# Altium PCB 7797-20-0224.PcbDoc (part 1 of 2)
Units mil, origin at the board's own origin, x right, y up, seen from the top; angles counter-clockwise.
Board outline 1680 x 2800 mil, 2 copper layers (Top Layer, Bottom Layer), stack 12.8 mil thick; 114 components, 80 nets, 405 pads, 230 vias.
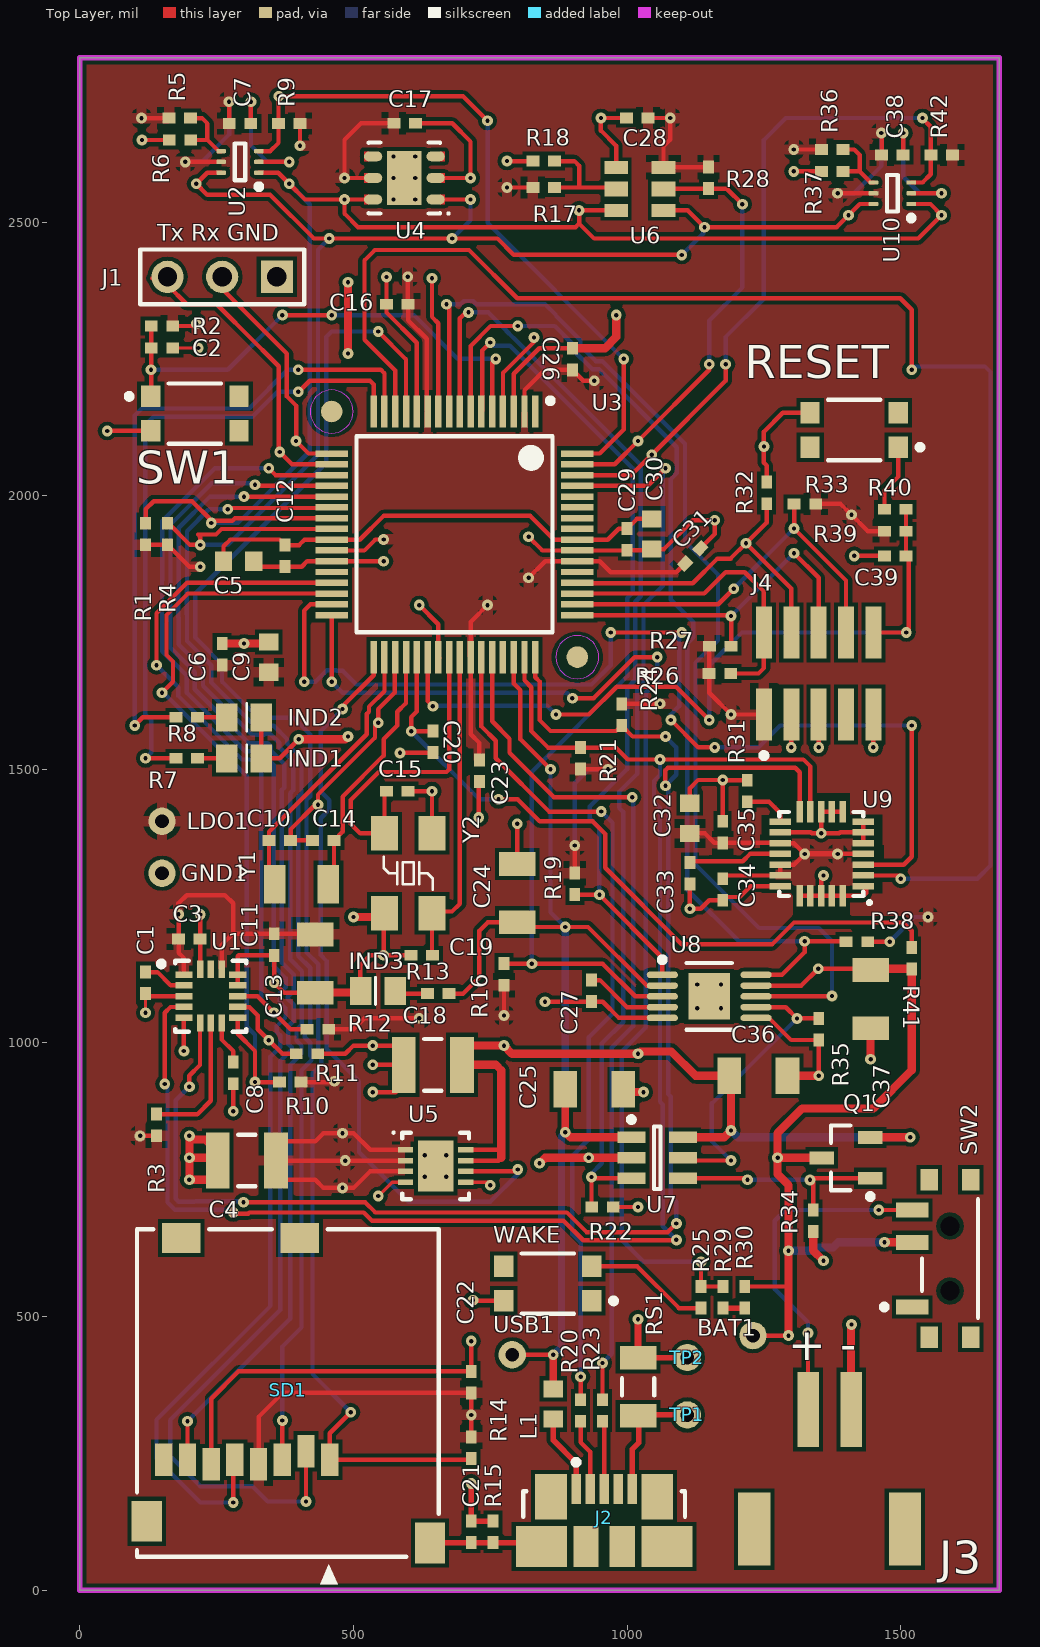
[diagram p0: Top Layer view]
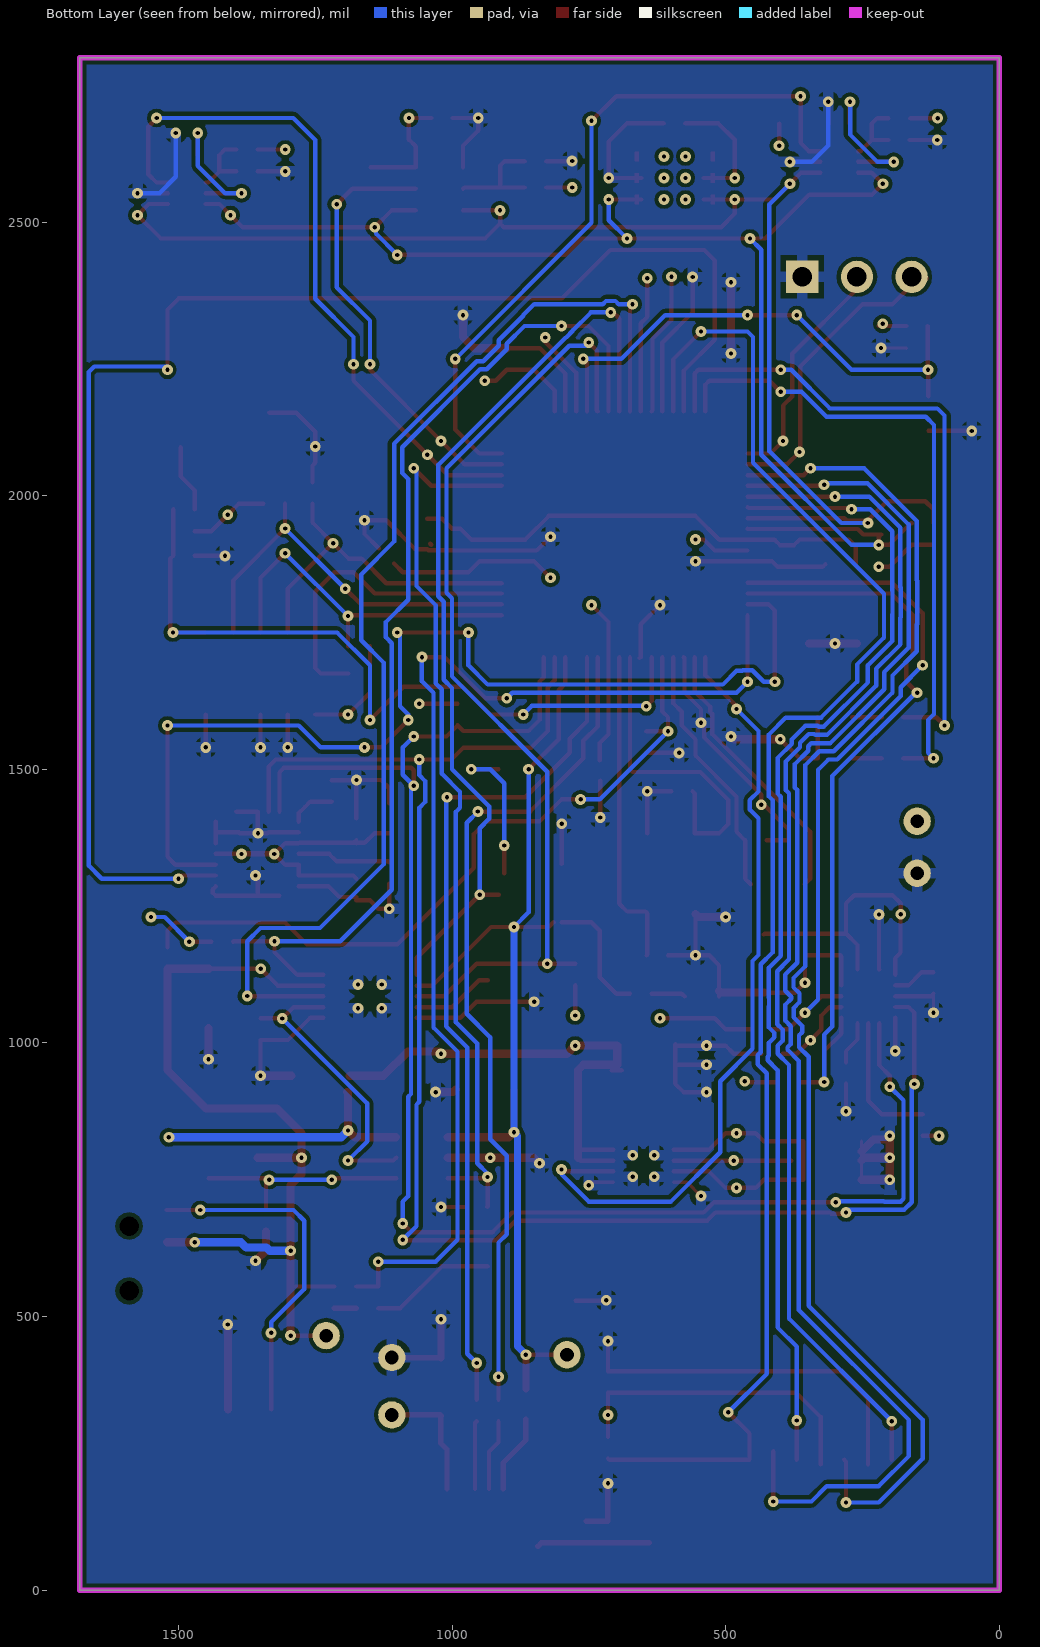
[diagram p1: Bottom Layer view, seen from below]

## Layer stack, top to bottom
Top Solder: solder mask 0.4, Solder Resist, Dk 3.5
Top Layer: signal copper 1.4
Dielectric 2: core 10, Dk 4.2
Bottom Layer: signal copper 1.4
Bottom Solder: solder mask 0.4, Solder Resist, Dk 3.5

## Board outline
20,0 1680,0 1680,2800 0,2800 0,0

## Design rules (kind name [scope] priority, off if disabled: settings)
AcuteAngle [All] p1: minimum=6.00000000000000E+0001 checktracksonly=FALSE
Clearance Clearance-uC [InComponent('U6')] p1: gap=6 ignorepadtopadclearanceinfootprint=FALSE except(0: Arc-Hole Track-Hole SMDPad-Hole THPad-Hole Via-Hole Fill-Hole Poly-Hole Region-Hole Text-Hole)
Clearance [All] p2: gap=7 ignorepadtopadclearanceinfootprint=FALSE except(0: Arc-Hole Track-Hole SMDPad-Hole THPad-Hole Via-Hole Fill-Hole Poly-Hole Region-Hole Text-Hole)
MinimumAnnularRing [All] p1: minimumring=5
PolygonConnect PolygonConnect_2 [All vs IsNamedPolygon('Bottom layer_full')] p1: connectstyle=Relief reliefconductorwidth=20 reliefentries=4 polygonreliefangle="90 Angle" airgapwidth=10
PolygonConnect PolygonConnect_1 [All vs IsNamedPolygon('Top layer_full')] p2: connectstyle=Relief reliefconductorwidth=20 reliefentries=4 polygonreliefangle="90 Angle" airgapwidth=10
PolygonConnect [All] p3: connectstyle=Relief reliefconductorwidth=10 reliefentries=4 polygonreliefangle="90 Angle" airgapwidth=10
RoutingVias [All] p1: holewidth=28 width=50 viastyle="Through Hole" minholewidth=28 minwidth=50 maxholewidth=28 maxwidth=50 useviatemplates=TRUE viatemplateguid#1={3E3A0D4B-A0A5-4DA1-8870-E81B4EFEB651} viatemplatename#1=v50h20
SolderMaskExpansion [All] p1: expansion=4
Width "Width Power" [(InNet('sGND') OR InNet('sPWR_3V7') OR InNet('sPWR_5V0') OR InNet('sUNREG') OR InNet('NetJ203_1') OR InNet('NetJ200_1') OR InNet('NetJ200_5'))] p1: maxlimit=15 minlimit=6 preferedwidth=15
Width [All] p2: maxlimit=10 minlimit=8 preferedwidth=8
30 further rules are at their usual default settings.

## Classes and differential pairs
channel class _temperature: "Temperature Left" "Temperature Right"
component class "Temperature Right": C38 R36 R37 R42 U10
component class "Temperature Left": C7 R5 R6 R9 U2
component class "Light And Humidity": C17 C28 R17 R18 R28 U4 U6
component class I/O: C2 IND1 IND2 IND3 J1 R2 R7 R8 R13 SW1
component class "I2C 0": R21 R24
component class "Accelerometer and Mangnetometer": C1 C3 C8 C11 C13 R3 R10 R11 R12 U1
component class Microcontroller: 90 C5 C6 C9 C10 C12 C14 C15 C16 C19 C20 C23 C26 C29 C30 C31 C39 J4 R25 R26 R27 R29 R30 R32 R33 R39 R40 R41 RESET U3 WAKE Y1 Y2
component class Power: BAT1 C4 C18 C21 C24 C25 C27 C36 C37 GND1 J2 J3 L1 LDO1 Q1 R15 R16 R19 R20 R22 R23 R34 R35 R38 RS1 SW2 TP1 TP2 U5 U7 U8 USB1
component class Gyroscope: C32 C33 C34 C35 R31 U9
component class "I2C 1": R1 R4
component class "Micro SD": C22 R14 SD1

## Components (designator, comment, footprint, x,y, rotation, side; value= is the part's Value field where it differs from the comment)
BAT1 "TP" TP_TH 1230,465 r90 top
C1 "GRM155R71A104KA01D" 0402 120,1109.69 r270 top value=0.1u
C2 "GRM155R71H102KA01J" 0402 150,2270 r180 top value=1000p
C3 "GRM155R71A104KA01D" 0402 200,1190 r180 top value=0.1u
C4 "GRM32ER71H106KA12L" 1210 305,785 r0 top value=10u
C5 "GRM188R71A225KE15D" 0603 290,1880 r0 top value=2.2u
C6 "GRM155R71C103KA01D" 0402 260,1710 r90 top value="0.01 µF"
C7 "GRM155R71C103KA01D" 0402 292.56,2680 r180 top value="0.01 µF" (schematic designator C9)
C8 "GRM155R71A104KA01D" 0402 280,945 r270 top value=0.1u (schematic designator C7)
C9 "GRM188R71A105KA61J" 0603 345,1705 r90 top value=1u (schematic designator C8)
C10 "GRM1555C1H240GA01D" 0402 365.32,1370 r180 top value=24p
C11 "GRM155R71A104KA01D" 0402 355,1179.68 r90 top value=0.1u
C12 "GRM155R71A104KA01D" 0402 375,1890 r270 top value=0.1u
C13 "GRM31CR71H475KA12L" 1206 430,1145 r90 top value=4.7u
C14 "GRM1555C1H240GA01D" 0402 444.69,1370 r0 top value=24p
C15 "GRM1555C1H330FA01D" 0402 580,1460 r180 top value=33p
C16 "GRM155R71A104KA01D" 0402 580,2350 r180 top value=0.1u
C17 "GRM155R71A104KA01D" 0402 593.43,2680.63 r180 top value=0.1u (schematic designator C36)
C18 "GRM32ER71H106KA12L" 1210 645,960 r0 top value=10u
C19 "GRM1555C1H330FA01D" 0402 625,1160 r0 top value=33p
C20 "GRM155R71A104KA01D" 0402 645,1550 r270 top value=0.1u
C21 "GRM155R71A104KA01D" 0402 715,106.38 r270 top value=0.1u
C22 "GRM155R71C103KA01D" 0402 715,380 r270 top value="0.01 µF"
C23 "GRM155R71A104KA01D" 0402 730,1497 r270 top value=0.1u
C24 "GRM31CR71H475KA12L" 1206 799.37,1273.78 r270 top value=4.7u
C25 "GRM31CR71H475KA12L" 1206 940,915 r180 top value=4.7u
C26 "GRM155R71C103KA01D" 0402 900,2249.69 r90 top value="0.01 µF"
C27 "GRM155R71A104KA01D" 0402 935,1095 r90 top value=0.1u
C28 "GRM155R71A104KA01D" 0402 1018.43,2690.12 r0 top value=0.1u (schematic designator C17)
C29 "GRM155R71A104KA01D" 0402 1000,1920 r270 top value=0.1u (schematic designator C28)
C30 "GRM188R71A105KA61J" 0603 1045,1930 r270 top value=1u (schematic designator C29)
C31 "GRM155R71C103KA01D" 0402 1120,1890 r45 top value="0.01 µF" (schematic designator C30)
C32 "GRM188R71A105KA61J" 0603 1114.69,1410.32 r90 top value=1u (schematic designator C31)
C33 "GRM155R71A104KA01D" 0402 1114.69,1310.32 r270 top value=0.1u (schematic designator C32)
C34 "GRM155R71A104KA01D" 0402 1174.69,1280.32 r90 top value=0.1u (schematic designator C33)
C35 "GRM155R71A104KA01D" 0402 1174.69,1385.32 r270 top value=0.1u (schematic designator C34)
C36 "GRM31CR71H475KA12L" 1206 1240,940 r180 top value=4.7u (schematic designator C35)
C37 "GRM31CR71H475KA12L" 1206 1445,1080 r90 top value=4.7u
C38 "GRM155R71C103KA01D" 0402 1484.69,2622.64 r180 top value="0.01 µF" (schematic designator C9)
C39 "GRM155R71A104KA01D" 0402 1490,1890 r180 top value=0.1u (schematic designator C38)
GND1 "TP" TP_TH 150,1310 r90 top
IND1 "LTST-C171GKT" 0805 300,1520 r0 top
IND2 "LTST-C171KSKT" 0805 300,1595 r0 top
IND3 "LTST-C171TBKT" 0805 545,1095 r180 top
J1 "Header 3" HDR1X3 360,2400 r180 top
J2 "47346-0001" MOLX-47346-0001-5_V 957.97,87.87 r0 top locked
J3 "S2B-PH-SM4-TB" S2B-PH-SM4-TB 1370,330 r0 top locked
J4 "M50-3600542" M50-3600542 1350,1675 r0 top
L1 "MPZ1608S331A" 1608[0603] 865,340 r90 top value="330 ohms"
LDO1 "TP" TP_TH 150,1405 r90 top
Q1 "IRLML6401" Micro3_N 1400,790 r180 top
R1 "CRCW04025K60FKEDHP" 0402 120,1930 r270 top value=5.6k (schematic designator R4)
R2 "CRCW040210K0FKEDHP" 0402 150,2310 r0 top value=10k (schematic designator R5)
R3 "CRCW040210K0FKED" 0402 140,850 r270 top value=10k (schematic designator R6)
R4 "CRCW04025K60FKEDHP" 0402 160,1930 r270 top value=5.6k (schematic designator R7)
R5 "DNP" 0402 182.56,2690 r180 top value=10k (schematic designator R10)
R6 "DNP" 0402 182.87,2650 r180 top value=10k (schematic designator R3)
R7 "CRCW0402560RFKEDHP" 0402 195,1520 r180 top value=560 (schematic designator R8)
R8 "CRCW0402560RFKEDHP" 0402 195,1595 r180 top value=560 (schematic designator R9)
R9 "CRCW040210K0FKED" 0402 382.56,2680 r180 top value=10k (schematic designator R22)
R10 "CRCW040210K0FKED" 0402 384.69,928.33 r180 top value=10k (schematic designator R12)
R11 "CRCW040210K0FKED" 0402 415,980 r0 top value=10k (schematic designator R13)
R12 "CRCW040210K0FKED" 0402 435,1025 r180 top value=10k (schematic designator R14)
R13 "CRCW0402560RFKEDHP" 0402 655,1090 r0 top value=560 (schematic designator R15)
R14 "CRCW040210K0FKEDHP" 0402 715,260 r90 top value=10k (schematic designator R16)
R15 "CRCW04021M00FKEDHP" 0402 755,106.38 r270 top value=1M (schematic designator R17)
R16 "CRCW040210K0FKED" 0402 775,1125 r90 top value=10k (schematic designator R18)
R17 "DNP" 0402 847.48,2563.27 r180 top value=10k (schematic designator R1)
R18 "DNP" 0402 847.48,2611.5 r180 top value=10k (schematic designator R11)
R19 "CRCW040210K0FKED" 0402 904.37,1290.63 r270 top value=10k
R20 "CRCW040233R0FKED" 0402 915,328.19 r90 top value=33
R21 "CRCW04025K60FKEDHP" 0402 915,1520 r270 top value=5.6k
R22 "CRCW040210K0FKED" 0402 955,700 r180 top value=10k (schematic designator R23)
R23 "CRCW040233R0FKED" 0402 955,328.19 r90 top value=33 (schematic designator R24)
R24 "CRCW04025K60FKEDHP" 0402 990,1600 r90 top value=5.6k (schematic designator R25)
R25 "CRCW0402560RFKEDHP" 0402 1135,535 r90 top value=560 (schematic designator R27)
R26 "CRCW040210K0FKED" 0402 1169.69,1675 r0 top value=10k (schematic designator R28)
R27 "CRCW040210K0FKED" 0402 1170,1725 r0 top value=10k (schematic designator R29)
R28 "CRCW040210K0FKED" 0402 1148.74,2580.75 r270 top value=10k (schematic designator R26)
R29 "CRCW0402100KFKED" 0402 1175,535 r90 top value=100k (schematic designator R31)
R30 "CRCW0402100KFKED" 0402 1215,535 r270 top value=100k (schematic designator R32)
R31 "CRCW040210K0FKED" 0402 1219.69,1460.32 r90 top value=10k (schematic designator R33)
R32 "CRCW040210K0FKED" 0402 1255,2005 r270 top value=10k (schematic designator R34)
R33 "CRCW040210K0FKED" 0402 1325,1985 r180 top value=10k (schematic designator R35)
R34 "CRCW04021M00FKEDHP" 0402 1340,675 r90 top value=1M (schematic designator R36)
R35 "CRCW04023K40FKED" 0402 1350,1025 r90 top value=3.4k (schematic designator R37)
R36 "DNP" 0402 1374.69,2632.64 r180 top value=10k (schematic designator R10)
R37 "DNP" 0402 1375,2592.64 r180 top value=10k (schematic designator R3)
R38 "CRCW040210K0FKED" 0402 1420,1185 r180 top value=10k
R39 "CRCW040210K0FKED" 0402 1490,1935 r180 top value=10k
R40 "CRCW0402560RFKEDHP" 0402 1490,1975 r0 top value=560
R41 "CRCW040256R0FKED" 0402 1520,1155 r270 top value=56
R42 "CRCW040210K0FKED" 0402 1574.69,2622.64 r180 top value=10k (schematic designator R22)
RESET "KMR231GLFS" KMR231GLFS 1415,2120 r180 top
RS1 "WSL1206R1000FEA" C1206 1020,371.5 r270 top value=0.1
SD1 "2908-05WB-MG" 3M-2908-05WB-MG_V 380,360 r180 top locked
SW1 "KMR231GLFS" KMR231GLFS 210,2150 r0 top
SW2 "PCM12SMTR" CKCP-PCM12SMTR_V 1590,605.95 r90 top
TP1 "TP" TP_TH 1110,320 r90 top
TP2 "TP" TP_TH 1110,425 r90 top
U1 "FXOS8700CQR1" FREE-QFN-16-3000X3000DE_V 239.21,1085.32 r0 top
U2 "TMP102AIDRLT" DRL0006A_L 292.56,2610 r180 top (schematic designator U4)
U3 "TM4C123GH6PM" QFP50P1200X1200X160-64N 684.53,1929.41 r270 top (schematic designator U2)
U4 "SI7006-A20-IM1" SLAB-DFN-6-1500X2400TP_V 592.91,2580.63 r180 top (schematic designator U9)
U5 "LT1965EDD-3.3#TRPBF" LT-DD-8_V 650,775 r0 top (schematic designator U3)
U6 "APDS-9303" APDS-9303 1023.19,2560.75 r180 top (schematic designator U5)
U7 "LTC4410ES6#PBF" LT-S6-6-TSOT-23_N 1055,790 r0 top (schematic designator U6)
U8 "LTC4053EMSE-4.2#PBF" LT-MSE-10-EDP-2060x1830TP_N 1150,1085 r0 top (schematic designator U7)
U9 "FXAS21002C" "SMD QFN 24_4X4MM 7/5" 1354.69,1345.32 r180 top (schematic designator U8)
U10 "TMP102AIDRLT" DRL0006A_L 1484.69,2552.64 r180 top (schematic designator U4)
USB1 "TP" TP_TH 790,430 r90 top
WAKE "KMR231GLFS" KMR231GLFS 855,560 r180 top
Y1 "CC7V-T1A-32.768kHz-12.5pF-20PPM-TC-QC" CC7V-T1A 405,1290 r0 top
Y2 "ECS-160-20-30B-DU" ECX-53B 600,1310 r90 top

## Footprints (in the part's own frame and the unit in brackets; to place one, negate y for a bottom-side part, rotate by r counter-clockwise, add the part's x,y. Pads: shape width x height; smd on the part's side, far side on the other; paste and mask are expansions set on the pad)
3M-2908-05WB-MG_V [mm] "Connector, MicroSD, 8 Position, Body 15.2x14mm, Pitch 1.1mm"
  rect 0.8x1.5 smd: 1(-1.94,3.1) 2(-0.84,2.7) 3(0.26,3.1) 4(1.36,3.3) 5(2.46,3.1) 6(3.56,3.3) 7(4.66,3.1) 8(5.76,3.1)
  rect 1.4x1.9 smd: 9(6.55,5.95) 12(-6.6,6.95)
  rect 1.8x1.4 smd: 10(4.95,-7.2) 11(-0.55,-7.2)
  silkscreen extent -7,-7.6 7,8.87, body extent -7,-7.6 7,7.6, height 1.85
0402 [mm] "Chip Capacitor, Body 1.0x0.5mm, IPC High Density"
  rect 0.6x0.5 smd: 1(-0.5,0) 2(0.5,0)
  body extent -0.55,-0.3 0.55,0.3, height 1.3
0603 [mm] "Chip Capacitor, Body 1.6x0.8mm, IPC High Density"
  rect 0.8x0.9 smd: 1(-0.7,0) 2(0.7,0)
  body extent -0.87,-0.48 0.87,0.48, height 1.3
0805 [mm]
  rect 1x1.3 smd: 1(-0.8,0) 2(0.8,0)
  silkscreen extent 0.13,-0.63 0.13,0.64, body extent -1.07,-0.64 1.07,0.76, height 0.7
1206 [mm] "Chip Capacitor, Body 3.2x1.6mm, IPC High Density"
  rect 1.1x1.7 smd: 1(-1.35,0) 2(1.35,0)
  body extent -1.7,-0.9 1.7,0.9, height 1.3
1210 [mm] "Chip Capacitor, Body 3.2x2.5mm, IPC High Density"
  rect 1.1x2.6 smd: 1(-1.35,0) 2(1.35,0)
  silkscreen extent -0.4,-1.2 0.4,1.2, body extent -1.7,-1.35 1.7,1.35, height 1.3
1608[0603] [mm] "Chip Capacitor, Body 1.6x0.8mm, IPC High Density"
  rect 0.8x0.9 smd: 1(-0.7,0) 2(0.7,0)
  body extent -0.87,-0.48 0.87,0.48, height 1.3
APDS-9303 [mm]
  rect 1.1x0.6 smd: 1(-1.1,-1) 2(1.1,-1) 4(1.1,1) 5(-1.1,1)
  rect 1.1x0.7 smd: 3(1.1,0) 6(-1.1,0)
  body extent -1.3,-1.1 1.3,1.1, height 0.55
C1206 [mm] "Chip Capacitor, Body 3.2x1.6mm, IPC High Density"
  rect 1.1x1.7 smd: 1(-1.35,0) 2(1.35,0)
  silkscreen extent -0.4,-0.75 0.4,0.75, body extent -1.7,-0.9 1.7,0.9, height 1.3
CC7V-T1A [mm]
  rect 1x1.8 smd: 1(-1.25,0) 2(1.25,0)
  body extent -1.65,-0.76 1.65,0.76, height 0.9
CKCP-PCM12SMTR_V [mm] "SMD, 3-Leads, Body 6.7x2.6mm"
  rect 0.7x1.5 smd: 1(-2.25,1.75) 2(0.75,1.75) 3(2.25,1.75)
  round 0.6 hole 0.9 unplated: MH1(-1.5,0) MH2(1.5,0)
  rect 1x0.8 smd: MP1(-3.65,0.965) MP2(3.65,0.965) MP3(-3.65,-0.965) MP4(3.65,-0.965)
  silkscreen extent -2.75,-1.3 2.75,3.17, body extent -3.68,-2.34 3.67,2.23, height 1.4
DRL0006A_L [mm] "SOT23, 6-Leads, Body 1.7x1.3mm, Pitch 0.5mm, IPC High Density"
  rrect50% 0.45x0.2 smd: 1(-0.875,0.5) 2(-0.875,0) 3(-0.875,-0.5) 4(0.875,-0.5) 5(0.875,0) 6(0.875,0.5)
  silkscreen extent -1,-0.85 0.25,1.27, body extent -0.65,-0.85 0.65,0.85, height 0.6
ECX-53B [mm]
  rect 1.6x1.25 smd: 1(-1.85,-1.1) 2(1.85,-1.1) 3(1.85,1.1) 4(-1.85,1.1)
  silkscreen extent -0.76,-1.14 0.76,1.14, body extent -2.54,-1.65 2.54,1.65, height 0.85
FREE-QFN-16-3000X3000DE_V [mm] "QFN, 16-Leads, Body 3.00x3.00mm, Pitch 0.50mm"
  rect 0.8x0.3 smd: 1(-1.25,1) 2(-1.25,0.5) 3(-1.25,0) 4(-1.25,-0.5) 5(-1.25,-1) 9(1.25,-1) 10(1.25,-0.5) 11(1.25,0) 12(1.25,0.5) 13(1.25,1)
  rect 0.3x0.8 smd: 6(-0.5,-1.25) 7(0,-1.25) 8(0.5,-1.25) 14(0.5,1.25) 15(0,1.25) 16(-0.5,1.25)
  silkscreen extent -2.42,-1.65 1.65,1.65, body extent -1.5,-1.5 1.5,1.5, height 1.25
HDR1X3 [mm] "Connector; Header; 3 Position"
  rect 1.5x1.5 hole 0.9: 1(0,0)
  round 1.5 hole 0.9: 2(2.54,0) 3(5.08,0)
  silkscreen extent -1.27,-1.27 6.35,1.27
KMR231GLFS [mm] "SMD, 4-Leads, Body 4.6x2.8mm"
  rect 0.9x1 smd: 1(-2.05,0.8) 2(2.05,0.8) 3(-2.05,-0.8) 4(2.05,-0.8)
  silkscreen extent -3.17,-1.4 1.21,1.4, body extent -2.3,-1.4 2.3,1.4, height 1.92
LT-DD-8_V [mm] "SON, 8-Leads, Body 3x3mm, Pitch 0.5mm, Thermal Pad 1.65x2.38 mm, IPC Low Density"
  rect 0.7x0.25 smd mask+0.102: 1(-1.4,0.75) 2(-1.4,0.25) 3(-1.4,-0.25) 4(-1.4,-0.75) 5(1.4,-0.75) 6(1.4,-0.25) 7(1.4,0.25) 8(1.4,0.75)
  rect 1.65x2.38 smd mask+0.102: 9(0,0)
  silkscreen extent -2,-1.55 1.55,1.6, body extent -1.5,-1.5 1.5,1.5, height 0.8
LT-MSE-10-EDP-2060x1830TP_N [mm] "SOP, 10-Leads, Body 3.1x3.1mm, Pitch 0.5mm, Thermal Pad 2.17x1.94mm, IPC Medium Density"
  oval 1.45x0.3 smd: 1(-2.175,1) 2(-2.175,0.5) 3(-2.175,0) 4(-2.175,-0.5) 5(-2.175,-1) 6(2.175,-1) 7(2.175,-0.5) 8(2.175,0) 9(2.175,0.5) 10(2.175,1)
  rect 1.94x2.17 smd: 11(0,0)
  silkscreen extent -2.3,-1.55 1.05,1.82, body extent -1.55,-1.55 1.55,1.55, height 1.1
LT-S6-6-TSOT-23_N [mm] "SOT23, 6-Leads, Body 2.9x1.75mm, Pitch 0.95mm, IPC Medium Density"
  rect 1.3x0.55 smd: 1(-1.2,0.95) 2(-1.2,0) 3(-1.2,-0.95) 4(1.2,-0.95) 5(1.2,0) 6(1.2,0.95)
  silkscreen extent -1.32,-1.45 0.15,1.9, body extent -0.87,-1.45 0.87,1.45, height 1
M50-3600542 [mm] "Header, 0.05\", 2x10, SMT"
  rect 0.74x2.4 smd: 1(-2.54,-1.905) 2(-2.54,1.905) 3(-1.27,-1.905) 4(-1.27,1.905) 5(0,-1.905) 6(0,1.905) 7(1.27,-1.905) 8(1.27,1.905) 9(2.54,-1.905) 10(2.54,1.905)
  silkscreen extent -2.67,-3.94 -2.41,-3.68, body extent -3.18,-2.62 3.17,2.88, height 4.7
Micro3_N [mm] "SOT23, 3-Leads, Body 2.9x1.3mm, Pitch 0.95mm, Lead Span 2.3mm, IPC Medium Density"
  rect 1.15x0.6 smd: 1(-1.125,0.95) 2(-1.125,-0.95) 3(1.125,0)
  silkscreen extent -1.25,-1.5 0.7,1.92, body extent -0.7,-1.5 0.7,1.5, height 1.12
MOLX-47346-0001-5_V [mm] "SMD, 5-Leads, Body 7.5x5mm, Pitch 0.65mm"
  rect 0.45x1.38 smd: 1(-1.3,2.46) 2(-0.65,2.46) 3(0,2.46) 4(0.65,2.46) 5(1.3,2.46)
  rect 1.475x2.1 smd: 6(-2.462,2.1) 7(2.462,2.1)
  rect 2.375x1.9 smd: 8(-2.913,-0.2) 11(2.913,-0.2)
  rect 1.175x1.9 smd: 9(-0.837,-0.2) 10(0.837,-0.2)
  silkscreen extent -3.75,1.16 3.75,3.82, body extent -3.99,-2.78 3.99,2.65, height 2.69
QFP50P1200X1200X160-64N [mm]
  rect 1.5x0.3 smd: 1(-5.7,3.75) 2(-5.7,3.25) 3(-5.7,2.75) 4(-5.7,2.25) 5(-5.7,1.75) 6(-5.7,1.25) 7(-5.7,0.75) 8(-5.7,0.25) 9(-5.7,-0.25) 10(-5.7,-0.75) 11(-5.7,-1.25) 12(-5.7,-1.75) 13(-5.7,-2.25) 14(-5.7,-2.75) 15(-5.7,-3.25) 16(-5.7,-3.75) 33(5.7,-3.75) 34(5.7,-3.25) 35(5.7,-2.75) 36(5.7,-2.25) 37(5.7,-1.75) 38(5.7,-1.25) 39(5.7,-0.75) 40(5.7,-0.25) 41(5.7,0.25) 42(5.7,0.75) 43(5.7,1.25) 44(5.7,1.75) 45(5.7,2.25) 46(5.7,2.75) 47(5.7,3.25) 48(5.7,3.75)
  rect 0.3x1.5 smd: 17(-3.75,-5.7) 18(-3.25,-5.7) 19(-2.75,-5.7) 20(-2.25,-5.7) 21(-1.75,-5.7) 22(-1.25,-5.7) 23(-0.75,-5.7) 24(-0.25,-5.7) 25(0.25,-5.7) 26(0.75,-5.7) 27(1.25,-5.7) 28(1.75,-5.7) 29(2.25,-5.7) 30(2.75,-5.7) 31(3.25,-5.7) 32(3.75,-5.7) 49(3.75,5.7) 50(3.25,5.7) 51(2.75,5.7) 52(2.25,5.7) 53(1.75,5.7) 54(1.25,5.7) 55(0.75,5.7) 56(0.25,5.7) 57(-0.25,5.7) 58(-0.75,5.7) 59(-1.25,5.7) 60(-1.75,5.7) 61(-2.25,5.7) 62(-2.75,5.7) 63(-3.25,5.7) 64(-3.75,5.7)
  round 1 smd mask+0.5: 65(-5.7,-5.7) 66(5.7,5.7)
  Top Layer keep-out region: -4.7,-5.7 -4.776,-5.317 -4.993,-4.993 -5.317,-4.776 -5.7,-4.7 -5.7,-4.7 -6.083,-4.776 -6.407,-4.993 -6.624,-5.317 -6.7,-5.7 -6.7,-5.7 -6.624,-6.083 -6.407,-6.407 -6.083,-6.624 -5.7,-6.7 -5.7,-6.7 -5.317,-6.624 -4.993,-6.407 -4.776,-6.083 -4.7,-5.7
  Top Layer keep-out region: 6.7,5.7 6.624,6.083 6.407,6.407 6.083,6.624 5.7,6.7 5.7,6.7 5.317,6.624 4.993,6.407 4.776,6.083 4.7,5.7 4.7,5.7 4.776,5.317 4.993,4.993 5.317,4.776 5.7,4.7 5.7,4.7 6.083,4.776 6.407,4.993 6.624,5.317 6.7,5.7
  silkscreen extent -6.32,-4.55 4.55,4.58, body extent -6.07,-6.07 6.07,6.07, height 1.62
S2B-PH-SM4-TB [mm] "2 pin JST connector"
  rect 1.5x3.4 smd: 0(-3.5,-5.55) 0(3.5,-5.55)
  rect 1x3.5 smd: 1(1,0) 2(-1,0)
  body extent -3.96,-7.22 3.94,1.38, height 5.6
SLAB-DFN-6-1500X2400TP_V [mm] "SON, 6-Leads, Body 3x3mm, Pitch 1mm, Thermal Pad 1.6x2.5mm"
  oval 0.85x0.45 smd mask+0.152: 1(-1.45,1) 2(-1.45,0) 3(-1.45,-1) 4(1.45,-1) 5(1.45,0) 6(1.45,1)
  rect 1.6x2.5 smd mask+0.152: 7(0,0)
  Top Layer region: 1.65,0.775 1.875,0.775 1.875,1.225 1.65,1.225
  Top Layer region: -1.875,-1.225 -1.65,-1.225 -1.65,-0.775 -1.875,-0.775
  Top Layer region: -1.875,-0.225 -1.65,-0.225 -1.65,0.225 -1.875,0.225
  Top Layer region: -1.875,0.775 -1.65,0.775 -1.65,1.225 -1.875,1.225
  Top Layer region: 1.65,-0.225 1.875,-0.225 1.875,0.225 1.65,0.225
  Top Layer region: 1.65,-1.225 1.875,-1.225 1.875,-0.775 1.65,-0.775
  silkscreen extent -2.1,-1.65 1.65,1.7, body extent -1.5,-1.5 1.5,1.5, height 0.8
"SMD QFN 24_4X4MM 7/5" [mm]
  rect 1x0.3 smd: 1(-1.95,1.5) 2(-1.95,1) 3(-1.95,0.5) 4(-1.95,0) 5(-1.95,-0.5) 6(-1.95,-1) 7(-1.95,-1.5) 13(1.9,-1.5) 14(1.9,-1) 15(1.9,-0.5) 16(1.9,0) 17(1.9,0.5) 18(1.9,1) 19(1.9,1.5)
  rect 0.3x1 smd: 8(-1,-1.95) 9(-0.5,-1.95) 10(0,-1.95) 11(0.5,-1.95) 12(1,-1.95) 20(1,1.95) 21(0.5,1.95) 22(0,1.95) 23(-0.5,1.95) 24(-1,1.95)
  silkscreen extent -2.27,-1.95 1.95,2.3, body extent -2,-2.01 2.01,2, height 0.9
TP_TH [mil]
  round 50 hole 25: 1(0,0)

## Part data
C1 C3 C8 C11 C12 C16 C17 C20 C21 C23 C27 C28 C29 C33 C34 C35 C39: library part GRM155R71AxxxKdddd, "-55-125C, 1005, 10V, X7R, ±10%", =DNP
C2: library part GRM155R71HxxxKdddd, "-55-125C, 1005, 50V, X7R, ±10%", =DNP
C4 C18: library part GRM32ER71HxxxKdddd, "-55-125C, 1005, 50V, X7R, ±10%", =DNP
C5 C9 C30 C32: library part GRM188R71AxxxKdddd, "-55-125C, 1608, 10V, X7R, ±10%", =DNP
C6 C7 C22 C26 C31 C38: library part Cap, "Cap, 0.01 µF, 16 V, X7R", LatestRevisionDate=17-Jul-2002, LatestRevisionNote="Re-released for DXP Platform.", PackageDescription="Radial Cap, Thru-Hole; 2 Leads; 0.3 in Pin Spacing", PackageReference=RAD-0.3, Published=8-Jun-2000, Publisher="Altium Limited"
C10 C14 C15 C19: library part "Cap Semi", "Capacitor (Semiconductor SIM Model)", LatestRevisionDate=29-May-2009, LatestRevisionNote="IPC-7351 Footprint Added.", PackageDescription="Chip Capacitor", PackageReference=C1206, Published=8-Jun-2000, Publisher="Altium Limited"
C13 C24 C25 C36 C37: library part GRM31CR71HxxxKdddd, "-55-125C, 3216, 50V, X7R, ±10%", =DNP
IND1: "LED", Color=Green
IND2: "LED", Color=Yellow
IND3: library part LTST-C171GKT, "LED", Color=Blue
J1: "Header, 3-Pin", LatestRevisionDate=17-Jul-2002, LatestRevisionNote="Re-released for DXP Platform.", Publisher="Altium Limited"
J2: library part CMP-2000-05246-1, "Micro-USB B Receptacle with Flange, -30 to 85 degC, 5-Pin SMD, RoHS, Tape and Reel", Color=Black, Manufacturer=Molex, Maximum Current Rating=1.8/ContactA, Maximum Voltage Rating=30VAC, Operating Temperature=-30to85C, Body Orientation=RightAngle, Contact Material=CopperAlloy, Contact Plating=GoldOverPalladiumNickelOverNickel, Datasheet URL=https://datasheet.ciiva.com/30075/304740473460001-io-nectors-30075527.pdf, Datasheet Version=Dec-13, Dimension=7.8x5.43x2.94mm, Gender=RCP, Housing Material=LiquidCrystalPolymer, Manufacturer URL=http://www.molex.com/, Mounting=SurfaceMount, Number of Contacts=5, Number of Ports=1, Number of Terminals=5, Packaging=EmbossedTapeandReel, Part No=47346-0001, Pitch=0.65mm, RoHS=Yes, Termination Method=Solder, Type=MicroUSBTypeB
J3: "JST Battery Connector"
L1: library part Inductor, "EMI Filter Beads, Chips & Arrays 0603 330ohms 100MHz Rdc 0.08ohms 1.7A", Code_IEC=1005, Code_JEITA=0402, LatestRevisionDate=29-May-2009, LatestRevisionNote="IPC-7351 Footprint Added.", PackageDescription="Chip Inductor", PackageReference=0402-A, Published=8-Jun-2000, Publisher="Altium Limited"
Q1: "MOSFET P-CH 12V 4.3A SOT-23", ComponentLink1Description="Manufacturer Link", ComponentLink1URL=http://www.irf.com/, ComponentLink2Description=Datasheet, ComponentLink2URL=http://www.irf.com/product-info/datasheets/data/IRLML6401.pdf, DatasheetVersion=2-Jul-2001, PackageDescription="3-Pin SOT-23 Package 0.95 mm Pitch, 2.3 mm Lead Span", PackageReference=Micro3, PackageVersion=Jul-2001, Published=17-Sep-2003, Publisher="Altium Limited"
R1 R2 R3 R4 R5 R6 R7 R8 R9 R10 R11 R12 R13 R14 R15 R16 R17 R18 R19 R20 R21 R22 R23 R24 R25 R26 R27 R28 R29 R30 R31 R32 R33 R34 R35 R36 R37 R38 R39 R40 R41 R42: library part CRCW0402xxxxFKED, "0.125W, -55-155C, 1005, 50V, ±1%", =DNP
RESET SW1 WAKE: "Switch Tactile, SPST, 50 mA, 32 V, -40 to 85 degC, 4-Pin SMD, RoHS, Tape and Reel", Actuator Color=N/A, Contact Rating @ Voltage=1A, Dielectric Strength=>=250Vrms, Manufacturer="C&K Components", Maximum DC Voltage Rating=32V, Minimum Insulation Resistance=>=1000MOhm, Operating Force=3N, Operating Temperature=-40to85C, Package Description="4-Pin Surface Mount Device, Body 4.6 x 2.8 mm", Actuator Length=0.5mm, Actuator Style=Button, Base Material=N/A, Body Orientation=Straight, Contact Material=Silver, Contact Plating=Silver, Datasheet URL=http://www.ck-components.com/media/1479/kmr2.pdf, Datasheet Version=06/2016, Dimension=2.8x4.6x1.9mm, ECCN=EAR99, Electrical Life=N/A, Family=KMR2, Ground Terminal=Yes, Housing Material=N/A, HTS=8536501199, Illumination Type=N/R, Manufacturer URL=http://www.ckswitches.com/, Maximum AC Voltage Rating=N/A, Mechanical Life=150000Cycles, Mounting=SurfaceMount,GullWing, Mounting Technology=SurfaceMount, Package Reference=KMR231GLFS, Packaging=TapeandReel, Part No=KMR231GLFS, Pole Throw Configuration=SPST, Product Weight=N/A, RoHS=Yes, Seal Description=N/A, Seal Location=N/A, Supplier=C&KComponents, Switch Configuration=N.O., Type=Micro-Miniature
RS1: library part "Res Semi", "Current Sense Resistors - SMD 1/4watt .1ohms 1%", LatestRevisionDate=17-Jul-2002, LatestRevisionNote="Re-released for DXP Platform.", PackageDescription="Axial Device, Thru-Hole; 2 Leads; 0.5 in Pin Spacing", PackageReference=AXIAL-0.5, Published=8-Jun-2000, Publisher="Altium Limited"
SD1: library part CMP-2000-05030-1, "Card Connector Micro-SD, 500 VAC, 100 mOhm Min, 0.5 A, RoHS, Tape and Reel", Manufacturer=3M, Package Description="8-Pin Surface Mount Device, Body 15.2 x 14 mm, Pitch 1.1 mm", Standard Package=1, Card Type=SecureDigital-microSD™, Catalog Drawings=2908-05WB-MG, Category=Connectors,Interconnects, Connector Type=ConnectorandEjector, Contact Finish=Gold, Contact Finish Thickness=15µin(0.38µm), Datasheet URL=http://datasheet.octopart.com/2908-05WB-MG-3M-datasheet-6398107.pdf, Datasheet Version=Oct-06, Ejector Side=-, Family=MemoryConnectors-PCCardSockets, Featured Product=3MCardConnectormicroSD, Features=Switch, Insertion, Removal Method=PushIn,PushOut, Manufacturer URL=http://www.3m.com/, Mounting Feature=Normal,Standard-Top, Mounting Type=SurfaceMount,RightAngle, Number of Positions=10(8+2), Online Catalog=2900Series, Other Names=3M5607CT, Other Related Documents=SDCardDateCodeDecipher, Package Reference=2908-05WB-MG, Packaging=CutTape(CT), PCN Obsolescence/ EOL=2908Series30/Jun/2010, Series=2900
SW2: library part CMP-2000-06884-1, "Ultraminiature Slide Switch, SPDT, 0.3 A, 6 V, -20 to 85 degC, 3-Pin SMD, RoHS, Tape and Reel", Contact Current-Max=0.3A, Manufacturer="C&K Components", Package Description="3-Pin Surface Mount Device, Body 6.7 x 2.6 mm", Circuitry=SPDT, Contact Material=SilverOverCopper, Datasheet URL=http://www.ck-components.com/media/1424/pcm.pdf, Datasheet Version=02/2016, Manufacturer URL=http://www.ckswitches.com/, Mounting Technology=SurfaceMount, Package Reference=PCM12SMTR, Switch Operation=On-On, Termination Style=RightAngle/SurfaceMount
U1: library part CMP-2000-05129-1, "6-Axis Xtrinsic Sensor with Integrated Linear Accelerometer and Magnetometer, 1.95 to 3.6 V, -40 to 85 degC, 16-Pin QFN, RoHS, Tape and Reel", Manufacturer=Freescale, Maximum Operating Temperature=+85C, Minimum Operating Temperature=-40C, Operating Supply Voltage=1.95Vto3.6V, Package / Case=QFN-16, Package Description="16-Pin Quad Flat No-lead Package, Body 3 x 3 mm, Pitch 0.5 mm", Supply Voltage - Max=3.6V, Supply Voltage - Min=1.95V, Brand=FreescaleSemiconductor, Datasheet URL=https://datasheet.ciiva.com/12175/fxos8700cq-60595-12175213.pdf, Datasheet Version="Rev. 1, 06/2012", Factory Pack Quantity=1000, Manufacturer URL=http://www.nxp.com/, Mounting Style=SMD/SMT, Output Type=Digital, Package Reference=QFN-16, Packaging=Reel, Product Category=BoardMountAccelerationSensors, RoHS=Details, Sensing Axis=X,Y,Z, Tradename=Xtrinsic, Type=6AxisSensor, Unit Weight=0.000808oz
U2 U10: library part CMP-1685-00013-1, "Low Power Digital Temperature Sensor with SMBus and Two-Wire Serial Interface, 1.4 to 3.6 V, -40 to 125 degC, 6-Pin SOT (DRL), Green (RoHS & no Sb/Br), Tape and Reel", ComponentLink1Description="Manufacturer URL", ComponentLink1URL=http://www.ti.com/, ComponentLink2Description=Datasheet, ComponentLink2URL=http://www.ti.com/lit/ds/symlink/tmp102.pdf, ComponentLink3Description="Package Specification", ComponentLink3URL=http://www.ti.com/lit/ml/mpds159c/mpds159c.pdf, DatasheetVersion="SBOS397F, 12/2015", PackageDescription="6-Pin Plastic Small Outline, Body 1.6 x 1.2 mm, Pitch 0.5 mm", PackageReference=DRL0006A, PackageVersion="4205622-3/D, 08/2207"
U3: "Tiva TM4C123GH6PM Microcontroller"
U4: library part CMP-2000-07060-1, "I2C Humidity and Temperature Sensor, 1.9 to 3.6 V, -40 to 125 degC, 6-Pin DFN, RoHS, Tube", Manufacturer="Silicon Labs", Maximum Operating Supply Voltage=3.6V, Maximum Operating Temperature=+125°C, Minimum Operating Supply Voltage=1.9V, Minimum Operating Temperature=-40°C, Package Description="6-Pin Small Outline No-Lead Package, Body 3 x 3 mm, Pitch 1 mm", Package Reference=DFN-6, Package Type=DFN, Accuracy=±1°C,±5%RH, Datasheet URL=https://www.silabs.com/Support%20Documents%2FTechnicalDocs%2FSi7006-A20.pdf, Datasheet Version="Rev. 1.1, 06/2015", Dimensions=3x3x0.75mm, Height=0.75mm, Interface Type=I2C, Length=3mm, Manufacturer URL=http://www.silabs.com/, Mounting Technology=SurfaceMount, Mounting Type=SurfaceMount, Output Type=Digital, Pin Count=6, Resolution=12(Humidity)bit,14(Temperature)bit, Sensor Function=Temperature&Humidity, Width=3mm
U5: library part CMP-0476-00225-1, "1.1 A, Low Noise, Low Dropout Linear Regulator, 1.8 to 20 V Vin, 3.3 V Vout, 8-pin SON (DD-8), -40 to 125 degC, Pb-Free, Tape and Reel", Dropout Voltage(V)=0.31, Manufacturer="Linear Technology", Output Voltage="3.3 V", Shutdown Current(uA)=1, Code_JEDEC=MO-229, ComponentLink1Description="Manufacturer URL", ComponentLink1URL=http://www.linear.com/, ComponentLink2Description=Datasheet, ComponentLink2URL=http://cds.linear.com/docs/en/datasheet/1965fa.pdf, ComponentLink3Description="Package Specification", ComponentLink3URL=http://cds.linear.com/docs/en/packaging/DFN_8_05-08-1698.pdf, DatasheetVersion="Rev. A", Discrete Pass Element=no, Iout(mA)=1100, Isupply(mA)=0.5, Mounting Technology="Surface Mount", Noise(uV)=40, Number of Outputs=1, PackageDescription="8-Pin Plastic DFN, Body 3 x 3 mm, Pitch 0.5 mm", PackageReference=DD-8, PackageVersion=Jun-10, Packing="Tape and Reel", PartNumber=LT1965EDD-3.3#TRPBF, PSRR(dB)=75, RoHS=TRUE, Vin Max(V)=20, Vin Min(V)=1.8
U7: "USB Power Manager, 4.35 to 5.5 V Vin, 6-pin SOT23 (S6-6), -40 to 85 degC, Pb-Free", Manufacturer="Linear Technology", Supplier Part Number 1=78T3424, Code_JEDEC=MO-193, ComponentLink1Description="Manufacturer URL", ComponentLink1URL=http://www.linear.com/, ComponentLink2Description=Datasheet, ComponentLink2URL=http://cds.linear.com/docs/en/datasheet/4410fs.pdf, ComponentLink3Description="Package Specification", ComponentLink3URL=http://cds.linear.com/docs/en/packaging/SOT_6_05-08-1636.pdf, Ideal Diode="Single, External, P-Channel", Mounting Technology="Surface Mount", PackageDescription="6-Pin Plastic TSOT-23, Body 2.9 x 1.63 mm, Pitch 0.95 mm", PackageReference=S6-6, PackageVersion=Jun-10, PartNumber=LTC4410ES6#PBF, RoHS=TRUE, Supplier 1=Newark
U8: "USB Compatible Lithium-Ion Battery Charger with Thermal Regulation, 4.25 to 6.5 V Vin, 10-pin SOP (MSE-10-EDP), -40 to 85 degC, Pb-Free", Float Voltage="4.2 V", Manufacturer="Linear Technology", Max Charge Current(A)=1.25, Supplier Part Number 1=LTC4053EMSE-4.2#PBF-ND, Battery Chemistry="Li-Ion, Li-Polymer", Charge Termination="On-board timer", ComponentLink1Description="Manufacturer URL", ComponentLink1URL=http://www.linear.com/, ComponentLink2Description=Datasheet, ComponentLink2URL=http://cds.linear.com/docs/en/datasheet/4053-4.2fs.pdf, ComponentLink3Description="Package Specification", ComponentLink3URL=http://cds.linear.com/docs/en/datasheet/3481fc.pdf, DatasheetVersion="Rev. A", Mounting Technology="Surface Mount", Number of Cells=1, PackageDescription="10-Pin Plastic MSOP, Exposed Die Pad, Body 3 x 3 mm, Pitch 0.5 mm", PackageReference=MSE-10, PackageVersion="Rev. C, 08/2009", PartNumber=LTC4053EMSE-4.2#PBF, RoHS=TRUE, Supplier 1=Digi-Key, Supplier 2=Farnell, Supplier 3=Newark, Supplier Part Number 2=1663727, Supplier Part Number 3=58M0850, Type of Charger=Linear, Vin Max(V)=6.5, Vin Min(V)=4.25
U9: "3-Axis Digital Angular Rate  Gyroscope"
Y1: library part CC7V-T1A, "Crystals 32.768 kHz 12.5 pF +/-20 PPM -55/+125C"
Y2: "Crystal, 16.000MHz, 20pF, 100ppm, -55 to 125 C, 60 O"

## Via types
v1: diameter 19.68, hole 7.87, Top Layer to Bottom Layer, 230 vias

## Nets (pads, with @x,y where several pads share a name; then routed paths per layer and width w, separated by ;. In a path a pad name is that pad's centre, name@x,y a point inside that pad or via, vN(x,y) a via of type N, cw(c..) or ccw(c..) an arc to the next point about the centre after c; other vN are vias at no path point)
A0/sIO_UARTRX: J1.2 U3.17 | length 439.9
  Top Layer w8: J1.2@282.5,2400 260,2377.5 378.32,2259.18 378.32,2181.37 395,2164.68 v1(395,2100) 417.95,2077.05 U3.17@460.12,2077.05
A1/sIO_UARTTX: J1.3 U3.18 | length 609.3
  Top Layer w8: J1.3@182.5,2397.5 132.5,2397.5 145,2385 160,2385 195,2350 250,2350 320,2280 345,2255 363.32,2236.69 363.32,2081.69 v1(365,2080) 387.64,2057.36 U3.18@460.12,2057.36
A2/SPI0_SCK: SD1.5 U3.19 | length 2541.5
  Top Layer w8: v1(280,160) 280,234.8 SD1.5@283.15,237.95 ; v1(345,2050) 357.32,2037.68 U3.19@460.12,2037.68
  Bottom Layer w8: v1(280,160) 220,160 140,240 140,311.1 348.16,519.26 348.16,974.44 365.84,992.12 365.84,1013.63 360,1019.48 360,1030.84 375.69,1046.53 375.69,1063.79 365,1074.48 365,1090.52 375.84,1101.37 375.84,1118.63 354.16,1140.32 354.16,1507.73 329.07,1532.82 302.33,1532.82 195,1640.15 195,1671.36 150.61,1715.75 150.61,1764.54 150,1765.15 150,1844.85 150.61,1845.46 150.61,1953.72 246.88,2050 v1(345,2050)
A3/sSD_CS: SD1.2 U3.20 | length 2631
  Top Layer w8: v1(320,2020) 322.01,2017.99 U3.20@460.12,2017.99 ; v1(413.07,161.93) SD1.2@413.07,253.7
  Bottom Layer w8: v1(320,2020) 320,2022.69 240.78,2022.69 165.61,1947.51 165.61,1839.25 165,1838.64 165,1771.36 165.61,1770.75 165.61,1721.97 210,1677.57 210,1646.36 308.54,1547.82 343.39,1547.82 349.16,1542.06 349.16,1533.94 373.34,1509.76 373.34,1466.45 369.16,1462.27 369.16,1146.53 390.84,1124.85 390.84,1095.15 380,1084.31 380,1080.69 390.69,1070 390.69,1040.31 380.84,1030.47 380.84,997.83 386.84,991.83 386.84,987.67 366.16,966.98 366.16,511.81 165,310.65 165,245 220,190 315,190 343.07,161.93 v1(413.07,161.93)
A4/sSPI0_MISO: SD1.7 U3.21 | length 2221.1
  Top Layer w8: SD1.7@196.53,237.95 v1(196.53,308.46) ; v1(300,1998.31) U3.21@460.12,1998.31
  Bottom Layer w8: v1(196.53,308.46) 384.16,496.09 384.16,959.53 404.84,980.21 404.84,995.05 395.84,1004.05 395.84,1024.26 405.69,1034.1 405.69,1088.78 405.84,1088.94 405.84,1131.06 384.16,1152.75 384.16,1456.06 390,1461.9 390,1514.31 364.16,1540.15 364.16,1548.27 347.95,1564.48 337.95,1564.48 336.29,1562.82 314.75,1562.82 225,1652.57 225,1683.79 180.61,1728.18 180.61,1776.97 180,1777.57 180,1832.43 180.61,1833.03 180.61,1941.3 237.62,1998.31 v1(300,1998.31)
A5/sSPI0_MOSI: SD1.3 U3.22 | length 2136.5
  Top Layer w8: v1(270,1975) 267.54,1977.46 458.96,1977.46 U3.22@460.12,1978.62 ; SD1.3@369.76,237.95 369.76,309.76 v1(370,310)
  Bottom Layer w8: v1(270,1975) 235.53,1975 195.61,1935.08 195.61,1826.82 195,1826.21 195,1783.79 195.61,1783.18 195.61,1734.39 240,1690 240,1658.79 320.97,1577.82 330.08,1577.82 331.74,1579.48 354.16,1579.48 379.16,1554.48 379.16,1546.37 405,1520.52 405,1455.69 399.16,1449.85 399.16,1158.96 420.84,1137.27 420.84,1082.73 420.69,1082.57 420.69,1066.89 420.84,1066.73 420.84,1028.04 410.84,1018.04 410.84,1010.26 420.84,1000.26 420.84,976.73 423.16,974.42 423.16,968.16 405,950 405,480 370,445 v1(370,310)
A6/sI2C1_SCL: R1.1 U2.1 U3.23 U4.6 U6.4 U10.1 | length 2680.4
  Top Layer w8: R1.1@120,1949.68 120,1975 135,1990 205,1990 v1@240,1955 ; v1(240,1950) v1@240,1955 ; U2.1@327.01,2590.32 362.24,2590.32 v1(382.56,2570) 411.3,2541.26 v1(483.43,2541.26) ; U3.23@460.12,1958.94 283.41,1958.94 278.63,1954.16 240.84,1954.16 v1@240,1955 ; U4.6@540.2,2541.26 v1(483.43,2541.26) ; U6.4@979.89,2521.38 v1(912.18,2521.38) 912.18,2497.32 ; U10.1@1519.13,2532.95 1554.37,2532.95 v1(1574.69,2512.64) 1531.95,2469.91 939.59,2469.91 912.18,2497.32 ; v1(483.43,2541.26) 483.43,2515.52 508.2,2490.75 905.6,2490.75 912.18,2497.32
  Bottom Layer w8: v1(240,1950) 288.79,1950 420,2081.21 420,2532.56 v1(382.56,2570)
A7/sI2C1_SDA: R4.1 U2.6 U3.24 U4.1 U6.5 U10.6 | length 2654.4
  Top Layer w8: R4.1@160,1949.68 160.31,1950 161.21,1950 201.21,1910 v1(220,1910) 220,1925 215.84,1929.16 248.63,1929.16 258.63,1939.16 460.02,1939.16 U3.24@460.12,1939.25 ; U2.6@258.11,2590.32 232.87,2590.32 v1(212.56,2570) 232.44,2550.12 347.44,2550.12 427.65,2469.91 v1(455.55,2469.91) v1(680.21,2469.91) 762.89,2469.91 792.79,2440 v1(1100,2440) ; U4.1@654.37,2541.26 666.67,2541.26 v1(713.74,2541.26) ; U6.5@1066.5,2521.38 1110.61,2521.38 v1(1141.24,2490.75) 1382.8,2490.75 v1(1404.69,2512.64) 1425,2532.95 U10.6@1450.24,2532.95
  Bottom Layer w8: v1(220,1910) 270,1910 435,2075 435,2449.35 v1(455.55,2469.91) ; v1(680.21,2469.91) 713.74,2503.44 v1(713.74,2541.26) ; v1(1100,2440) 1139.01,2479.01 1139.01,2488.51 v1(1141.24,2490.75)
B2/sI2C0_SCL: R21.1 U1.4 U3.47 U9.11 | length 3006.6
  Top Layer w8: v1(155,925) 155,1055 165.63,1065.63 U1.4@190,1065.63 ; v1(280,690) 281.97,688.03 307.5,688.03 309.48,690 518.79,690 533.79,675 883.79,675 919.63,639.16 v1@1089.16,639.16 ; U3.47@812.48,1705 812.48,1662.52 825,1650 825,1570 855.31,1539.68 R21.1@915,1539.68 979.1,1539.68 1000.98,1517.81 v1(1060,1517.81) 1322.19,1517.81 1335,1505 U9.11@1335,1422.09
  Bottom Layer w8: v1(155,925) 160,920 160,708.79 173.79,695 275,695 v1(280,690) ; v1(1060,1517.81) 1060,1489.48 1049.16,1478.63 1049.16,1440.31 1060,1429.47 1060,892.21 1065,887.21 1065,665 v1(1090,640)